# Altium PCB M2 PCB.PcbDoc
Units mm, origin at the board's own origin, x right, y up, seen from the top; angles counter-clockwise.
Board outline 128.4 x 50.8 mm, 2 copper layers (Top Layer, Bottom Layer); 14 components, 30 nets, 109 pads, 1 vias.
Unrouted connection lines stored in the file: 47.
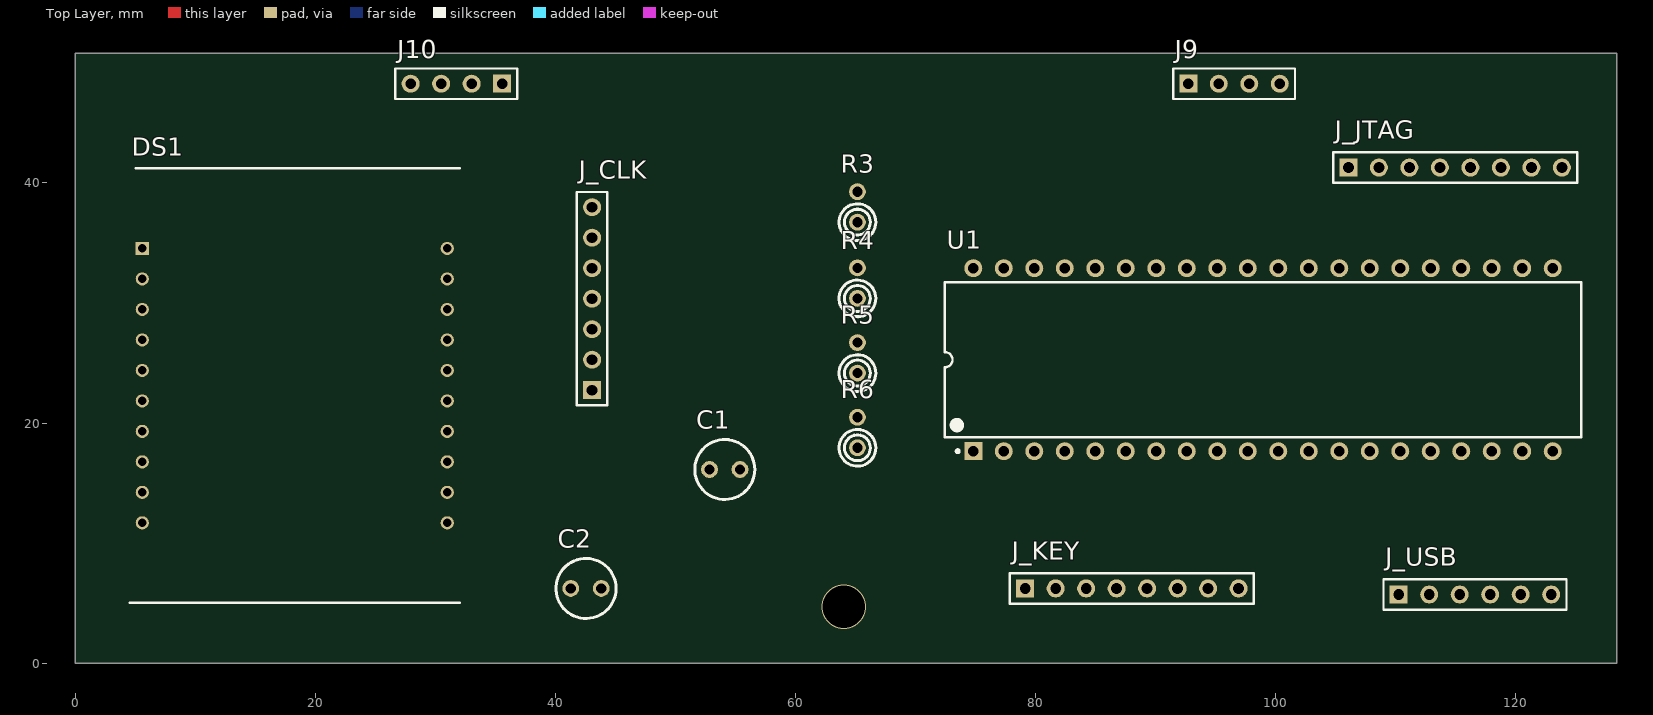
[diagram p0: Top Layer view]
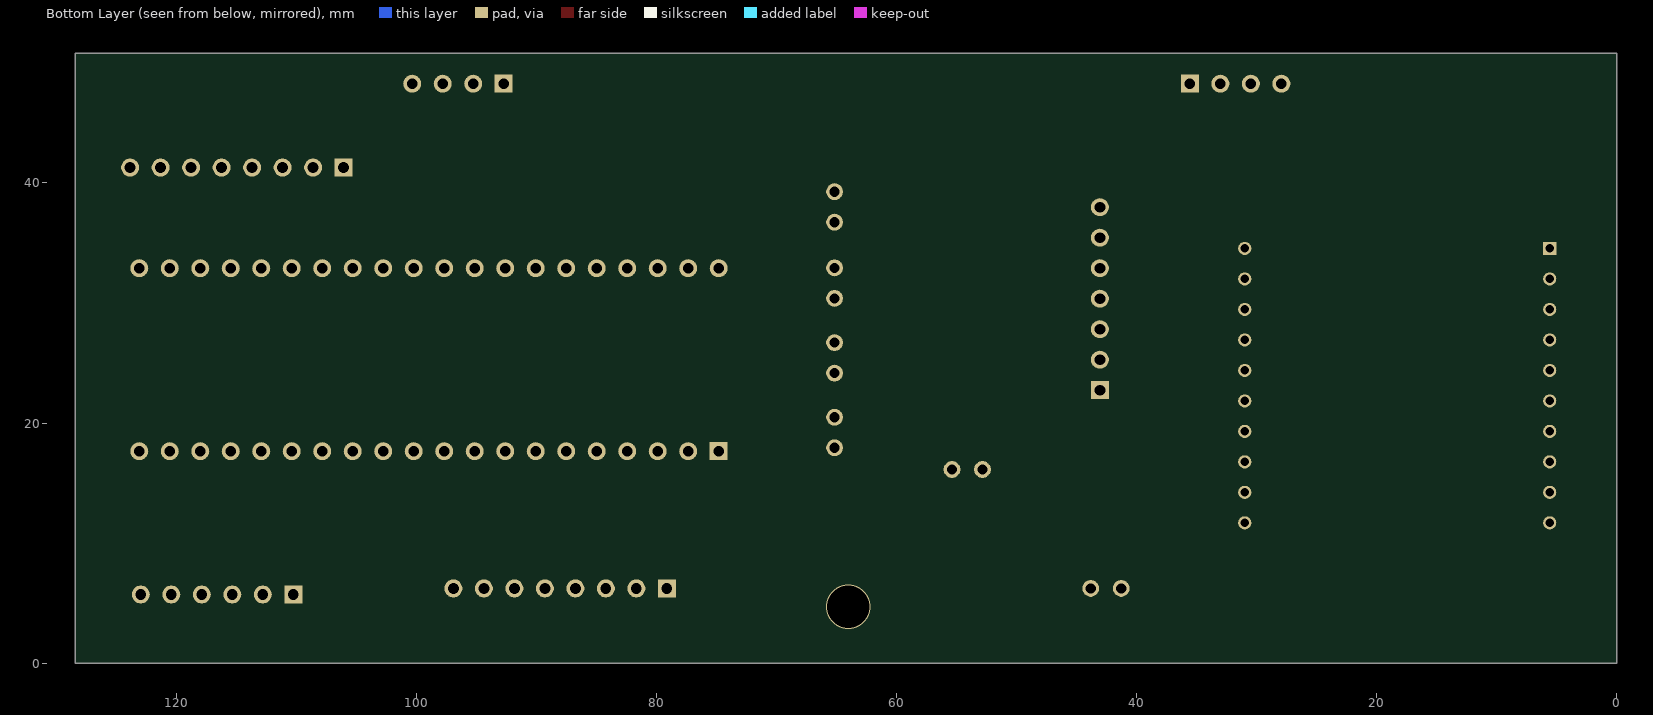
[diagram p1: Bottom Layer view, seen from below]

## Layer stack, top to bottom
Top Solder: solder mask 0.0102, Solder Resist, Dk 3.5
Top Layer: signal copper 0.0356
Dielectric 1: dielectric 0.32, FR-4, Dk 4.8
Bottom Layer: signal copper 0.0356
Bottom Solder: solder mask 0.0102, Solder Resist, Dk 3.5

## Board outline
0,0 128.397,0 128.397,50.8 0,50.8

## Design rules (kind name [scope] priority, off if disabled: settings)
Clearance [All] p1: gap=0.254 ignorepadtopadclearanceinfootprint=FALSE except(0: Arc-Hole Track-Hole SMDPad-Hole THPad-Hole Via-Hole Fill-Hole Poly-Hole Region-Hole Text-Hole)
PolygonConnect [All] p1: connectstyle=Relief reliefconductorwidth=0.254 reliefentries=4 polygonreliefangle="90 Angle" airgapwidth=0.254
RoomDefinition "M1 Schematic" [InComponentClass('M1 Schematic')] p1: confinementstyle=ConfineIn formatcopy=TRUE lockcomponents=FALSE outline 130.302,1.524 261.112,1.524 261.112,54.102 130.302,54.102
RoutingVias [All] p1: holewidth=0.711 width=1.27 viastyle="Through Hole" minholewidth=0.711 minwidth=1.27 maxholewidth=0.711 maxwidth=1.27
SolderMaskExpansion [All] p1: expansion=0.102 istentingtop=FALSE
Width [All] p1: maxlimit=0.254 minlimit=0.254 preferedwidth=0.254
30 further rules are at their usual default settings.

## Components (designator, comment, footprint, x,y, rotation, side; value= is the part's Value field where it differs from the comment)
C1 "Cap" RADIAL-0.1 54.102,16.129 r0 top value=1UF
C2 "Cap" RADIAL-0.1 42.545,6.223 r0 top value=1UF
DS1 "EA_DOGS104W-A" DIP2540W50P254L3600H260Q20N 18.288,23.114 r0 top
J9 "Signals" HDR1X4 92.71,48.26 r0 top locked
J10 "Power" HDR1X4 35.56,48.26 r180 top locked
J_CLK "Header 7" HDR1X7 43.053,22.733 r90 top
J_JTAG "Header 8" HDR1X8 106.045,41.275 r0 top
J_KEY "Header 8" HDR1X8 79.121,6.223 r0 top
J_USB "Header 6" HDR1X6 110.236,5.715 r0 top
R3 "Res1" AXIAL-0.1-RES 65.151,38 r90 top value=10K
R4 "Res1" AXIAL-0.1-RES 65.151,31.65 r90 top value=10K
R5 "Res1" AXIAL-0.1-RES 65.151,25.427 r90 top value=10K
R6 "Res1" AXIAL-0.1-RES 65.151,19.204 r90 top value=10K
U1 "ATmega32A-PU" 40P6 98.933,25.273 r90 top

## Footprints (in the part's own frame and the unit in brackets; to place one, negate y for a bottom-side part, rotate by r counter-clockwise, add the part's x,y. Pads: shape width x height; smd on the part's side, far side on the other; paste and mask are expansions set on the pad)
40P6 [mm] "40-Pin Ceramic Dual In-Line Package (CerDIP)"
  rect 1.5x1.5 hole 0.9: 1(-7.62,24.13)
  round 1.5 hole 0.9: 2(-7.62,21.59) 3(-7.62,19.05) 4(-7.62,16.51) 5(-7.62,13.97) 6(-7.62,11.43) 7(-7.62,8.89) 8(-7.62,6.35) 9(-7.62,3.81) 10(-7.62,1.27) 11(-7.62,-1.27) 12(-7.62,-3.81) 13(-7.62,-6.35) 14(-7.62,-8.89) 15(-7.62,-11.43) 16(-7.62,-13.97) 17(-7.62,-16.51) 18(-7.62,-19.05) 19(-7.62,-21.59) 20(-7.62,-24.13) 21(7.62,-24.13) 22(7.62,-21.59) 23(7.62,-19.05) 24(7.62,-16.51) 25(7.62,-13.97) 26(7.62,-11.43) 27(7.62,-8.89) 28(7.62,-6.35) 29(7.62,-3.81) 30(7.62,-1.27) 31(7.62,1.27) 32(7.62,3.81) 33(7.62,6.35) 34(7.62,8.89) 35(7.62,11.43) 36(7.62,13.97) 37(7.62,16.51) 38(7.62,19.05) 39(7.62,21.59) 40(7.62,24.13)
  silkscreen extent -7.74,-26.5 6.45,26.5, body extent -7.05,-26.47 7.05,26.47, height 5.72
AXIAL-0.1-RES [mm] "Axial Device, Thru-Hole; 2 Leads; 0.3 in Pin Spacing"
  round 1.4 hole 0.85: 1(-1.27,0) 2(1.27,0)
  silkscreen extent -2.8,-1.53 0.26,1.53
DIP2540W50P254L3600H260Q20N [mm]
  rect 1.1x1.1 hole 0.7: 1(-12.7,11.43)
  round 1.1 hole 0.7: 2(-12.7,8.89) 3(-12.7,6.35) 4(-12.7,3.81) 5(-12.7,1.27) 6(-12.7,-1.27) 7(-12.7,-3.81) 8(-12.7,-6.35) 9(-12.7,-8.89) 10(-12.7,-11.43) 11(12.7,-11.43) 12(12.7,-8.89) 13(12.7,-6.35) 14(12.7,-3.81) 15(12.7,-1.27) 16(12.7,1.27) 17(12.7,3.81) 18(12.7,6.35) 19(12.7,8.89) 20(12.7,11.43)
  silkscreen extent -13.75,-18.1 13.75,18.1, body extent -13.75,-18 13.75,18, height 2.6
HDR1X4 [mm] "Connector; Header; 4 Position"
  rect 1.5x1.5 hole 0.9: 1(0,0)
  round 1.5 hole 0.9: 2(2.54,0) 3(5.08,0) 4(7.62,0)
  silkscreen extent -1.27,-1.27 8.89,1.27
HDR1X6 [mm] "Connector; Header; 6 Position"
  rect 1.5x1.5 hole 0.9: 1(0,0)
  round 1.5 hole 0.9: 2(2.54,0) 3(5.08,0) 4(7.62,0) 5(10.16,0) 6(12.7,0)
  silkscreen extent -1.27,-1.27 13.97,1.27
HDR1X7 [mm] "Connector; Header; 7 Position"
  rect 1.5x1.5 hole 0.9: 1(0,0)
  round 1.5 hole 0.9: 2(2.54,0) 3(5.08,0) 4(7.62,0) 5(10.16,0) 6(12.7,0) 7(15.24,0)
  silkscreen extent -1.27,-1.27 16.51,1.27
HDR1X8 [mm] "Connector; Header; 8 Position"
  rect 1.5x1.5 hole 0.9: 1(0,0)
  round 1.5 hole 0.9: 2(2.54,0) 3(5.08,0) 4(7.62,0) 5(10.16,0) 6(12.7,0) 7(15.24,0) 8(17.78,0)
  silkscreen extent -1.27,-1.27 19.05,1.27
RADIAL-0.1 [mm] "Axial Device, Thru-Hole; 2 Leads; 0.3 in Pin Spacing"
  round 1.4 hole 0.85: 1(-1.27,0) 2(1.27,0)
  silkscreen extent -2.5,-2.5 2.5,2.5

## Part data
C1 C2: library part "CAP ALUM 1UF 20% 100V RADIAL", "Capacitor", Manufacturer Part Number=ESE105M100AC3EA, Voltage Rating=100V, LatestRevisionDate=17-Jul-2002, LatestRevisionNote="Re-released for DXP Platform.", Published=8-Jun-2000, Publisher="Altium Limited"
DS1: "Lcd Mod 40 Dig 10 X 4 Reflective", Background Color=White, Manufacturer="Display Visions", Manufacturer Part Number=EADOGS104W-A, Manufacturer_Name="ELECTRONIC ASSEMBLY", Manufacturer_Part_Number="EA DOGS104W-A", Max Operating Temperature=70°C, Min Operating Temperature=-20°C, Mouser2 Part Number=790-EADOGS104W-A, Supplier Part Number 1=1481-1233-ND, Backlight Type=LED, ComponentLink1Description=http://www.lcd-module.de/fileadmin/html-seiten/eng/pdf/doma/dogs104e.pdf?src-supplier=Digi-Key, ComponentLink1URL=http://www.lcd-module.de/fileadmin/html-seiten/eng/pdf/doma/dogs104e.pdf?src-supplier=Digi-Key, Datasheet Link="https://componentsearchengine.com//EA DOGS104W-A.pdf", Height=2.6mm, Interface=I2C,SPI, Mouser2 Price/Stock=https://www.mouser.com/Search/Refine.aspx?Keyword=790-EADOGS104W-A, Number of Characters=40, Pricing 1="1=18.94000, 10=14.28400, 100=11.99810, 500=11.55000 (USD)", RoHS=No, Stock 1=221, Supplier 1=Digi-Key
J9 J10: library part "Header 4", "Conn Header Vert 4POS 2.54MM", Color=Black, Manufacturer=Sullins, Manufacturer Part Number=PRPC004SAAN-RC, Package Quantity=1, Supplier Part Number 1=S1011EC-04-ND, Category=Connectors, ComponentLink1Description=https://datasheet.ciiva.com/741/xrxczzzsxxn-rc-st-11635-b-741241.pdf?src-supplier=Digi-Key, ComponentLink1URL=https://datasheet.ciiva.com/741/xrxczzzsxxn-rc-st-11635-b-741241.pdf?src-supplier=Digi-Key, Connector Type="Male Pin", Contact Mating Length=0.23inch, Contact Plating=Gold, Contact Type="Male Pin", LatestRevisionDate=17-Jul-2002, LatestRevisionNote="Re-released for DXP Platform.", Mount="Through Hole", Number of Positions=4, Number of Rows=1, Packaging=Bulk, Pitch=0.1inch, Pricing 1="1=0.15000, 10=0.14600, 25=0.10840, 50=0.09280, 100=0.08980, 250=0.07740, 500=0.07430 (USD)", Publisher="Altium Limited", RoHS=Yes, RoHS Compliant=Yes, Series=-, Stock 1=11461, Supplier 1=Digi-Key, Termination=Solder
J_CLK: "Female, 7C, Straight, .100\"CC; 3.20mm Tail, No Mt. 100u\" Tin; PBT, Phos Bronze, 105 C", Color=Black, Manufacturer=Sullins, Manufacturer Part Number=PPTC071LFBN-RC, Package Quantity=1000, Supplier Part Number 1=S7005-ND, Category=Connectors, ComponentLink1Description=https://media.digikey.com/pdf/Data%20Sheets/Sullins%20PDFs/Female_Headers.100_DS.pdf?src-supplier=Digi-Key, ComponentLink1URL=https://media.digikey.com/pdf/Data%20Sheets/Sullins%20PDFs/Female_Headers.100_DS.pdf?src-supplier=Digi-Key, ComponentLink2Description=http://www.sullinscorp.com/catalogs/78_Page80-81_HEADER_.100_2.54mm_FEMALE.pdf?src-supplier=Future+Electronics, ComponentLink2URL=http://www.sullinscorp.com/catalogs/78_Page80-81_HEADER_.100_2.54mm_FEMALE.pdf?src-supplier=Future+Electronics, Connector Type=Header, Contact Material=Bronze, Contact Plating=Tin, Contact Type="Female Socket", Height=8.5mm, Housing Material=Plastic, LatestRevisionDate=17-Jul-2002, LatestRevisionNote="Re-released for DXP Platform.", Lead Free="Lead Free", Length=18.3mm, Mount="Through Hole", Number of Positions=7, Number of Rows=1, Packaging=Bulk, Pitch=0.1inch, Pricing 1="1=0.59000, 10=0.51500, 80=0.42438, 440=0.36900, 1000=0.30442, 5000=0.26752, 10000=0.26650 (USD)", Publisher="Altium Limited", RoHS=Yes, Stock 1=25873, Supplier 1=Digi-Key, Termination=Solder, Width=2.5mm
J_JTAG J_KEY: "Conn Header Vert 8POS 2.54MM", Color=Black, Manufacturer=Sullins, Manufacturer Part Number=PRPC008SAAN-RC, Package Quantity=1, Supplier Part Number 1=S1011EC-08-ND, Category=Connectors, ComponentLink1Description=https://datasheet.ciiva.com/741/xrxczzzsxxn-rc-st-11635-b-741237.pdf?src-supplier=Digi-Key, ComponentLink1URL=https://datasheet.ciiva.com/741/xrxczzzsxxn-rc-st-11635-b-741237.pdf?src-supplier=Digi-Key, Connector Type="Male Pin", Contact Mating Length=0.23inch, Contact Plating=Gold, Contact Type="Male Pin", LatestRevisionDate=17-Jul-2002, LatestRevisionNote="Re-released for DXP Platform.", Lead Free="Lead Free", Mount="Through Hole", Number of Positions=8, Number of Rows=1, Packaging=Bulk, Pitch=0.1inch, Pricing 1="1=0.25000, 10=0.23200, 25=0.19800, 50=0.17340, 100=0.16100, 250=0.14240, 500=0.13622 (USD)", Publisher="Altium Limited", RoHS=Yes, RoHS Compliant=Yes, Series=-, Stock 1=4930, Supplier 1=Digi-Key, Termination=Solder
J_USB: "Conn Header .100\" Sngl Str 6POS", Color=Black, Manufacturer=Sullins, Manufacturer Part Number=PRPC006SAAN-RC, Package Quantity=1, Supplier Part Number 1=S1011EC-06-ND, Category=Connectors, ComponentLink1Description=https://datasheet.ciiva.com/741/xrxczzzsxxn-rc-st-11635-b-741239.pdf?src-supplier=Digi-Key, ComponentLink1URL=https://datasheet.ciiva.com/741/xrxczzzsxxn-rc-st-11635-b-741239.pdf?src-supplier=Digi-Key, Connector Type="Male Pin", Contact Mating Length=0.23inch, Contact Plating=Gold, Contact Type="Male Pin", LatestRevisionDate=17-Jul-2002, LatestRevisionNote="Re-released for DXP Platform.", Lead Free="Lead Free", Mount="Through Hole", Number of Positions=6, Number of Rows=1, Packaging=Bulk, Pitch=0.1inch, Pricing 1="1=0.19000, 10=0.17400, 25=0.14880, 50=0.13000, 100=0.12070, 250=0.10680, 500=0.10216 (USD)", Publisher="Altium Limited", RoHS=Yes, RoHS Compliant=Yes, Series=-, Stock 1=13258, Supplier 1=Digi-Key, Termination=Solder
R3 R4 R5 R6: library part "RES 10K OHM 5% 1/4W AXIAL", "Resistor", Manufacturer Part Number=CFR-25JB-52-10K, Power Rating=1/4W, Tolerance=0.05, LatestRevisionDate=17-Jul-2002, LatestRevisionNote="Re-released for DXP Platform.", Published=8-Jun-2000, Publisher="Altium Limited"
U1: library part CMP-0095-00028-2, "8-bit AVR Microcontroller, 2.7-5.5V, 16MHz, 32KB Flash, 1KB EEPROM, 2KB SRAM, 40-pin PDIP, Industrial Grade (-40°C to 85°C)", Case/Package=DIP, Frequency=20MHz, Manufacturer=Microchip, Manufacturer Part Number=ATMEGA324A-PU, Max Operating Temperature=85°C, Min Operating Temperature=-40°C, Supplier Part Number 1=ATMEGA324A-PU-ND, Category=Microcontrollers, Code_JEDEC=MS-011-AC, ComponentLink1Description="Manufacturer URL", ComponentLink1URL=http://www.atmel.com/, ComponentLink2Description="ATmega32A Datasheet", ComponentLink2URL=http://www.atmel.com/dyn/resources/prod_documents/doc8155.pdf, ComponentLink3Description="ATmega32A Summary", ComponentLink3URL=http://www.atmel.com/dyn/resources/prod_documents/8155S.pdf, ComponentLink4Description=http://ww1.microchip.com/downloads/en/devicedoc/Atmel-8272-8-bit-AVR-microcontroller-ATmega164A_PA-324A_PA-644A_PA-1284_P_summary.pdf?src-supplier=Digi-Key, ComponentLink4URL=http://ww1.microchip.com/downloads/en/devicedoc/Atmel-8272-8-bit-AVR-microcontroller-ATmega164A_PA-324A_PA-644A_PA-1284_P_summary.pdf?src-supplier=Digi-Key, Core Architecture=AVR, DatasheetVersion="revC, Feb-2011", Interface=I2C,SPI,UART,USART, Memory Size=32KB, Memory Type=FLASH, Number of I/Os=32, Oscillator Type=Internal, PackageDescription="40-lead (0.600\"/15.24mm Wide) Plastic Dual Inline Package (PDIP)", PackageReference=40P6, PackageVersion="revB, Sep-2001", Packaging=Rail/Tube, Peripherals="Brown-out Detect/Reset,POR,PWM,WDT", Pricing 1="1=4.77000, 25=4.38160, 100=3.97500 (USD)", RevisionNote="DatasheetVersion updated. URLs added.", RoHS=Yes, RoHS Compliant=Yes, Stock 1=315, Supplier 1=Digi-Key

## Via types
v1: diameter 3.71, hole 3.51, Top Layer to Bottom Layer, 1 vias

## Nets (pads, with @x,y where several pads share a name; then routed paths per layer and width w, separated by ;. In a path a pad name is that pad's centre, name@x,y a point inside that pad or via, vN(x,y) a via of type N, cw(c..) or ccw(c..) an arc to the next point about the centre after c; other vN are vias at no path point)
"+3.3 V": J10.3 J_CLK.1 J_JTAG.2 J_USB.4
"+5 V": C1.1 DS1.13 J10.2 U1.10
/TXEN: J9.1 U1.20
GND: C1.2 C2.2 DS1.12 DS1.14 DS1.18 DS1.19 J9.4 J10.4 J_CLK.2 J_JTAG.3 J_USB.6 U1.31
LO_F1_0: J9.2 J_CLK.7
LO_F1_90: J9.3 J_CLK.6
LO_F2: J10.1 J_CLK.5
NetC2_1: C2.1 DS1.11
NetDS1_15: DS1.15 DS1.16 J_CLK.3 U1.23
NetDS1_17: DS1.17 J_CLK.4 U1.22
NetDS1_20: DS1.20 U1.21
NetJ_JTAG_4: J_JTAG.4 U1.26
NetJ_JTAG_5: J_JTAG.5 U1.24
NetJ_JTAG_6: J_JTAG.6 U1.9
NetJ_JTAG_7: J_JTAG.7 U1.27
NetJ_JTAG_8: J_JTAG.8 U1.25
NetJ_KEY_1: J_KEY.1 R3.1
NetJ_KEY_2: J_KEY.2 R4.1
NetJ_KEY_3: J_KEY.3 R5.1
NetJ_KEY_4: J_KEY.4 R6.1
NetJ_KEY_5: J_KEY.5 U1.1
NetJ_KEY_6: J_KEY.6 U1.2
NetJ_KEY_7: J_KEY.7 U1.3
NetJ_KEY_8: J_KEY.8 U1.4
NetJ_USB_2: J_USB.2 U1.15
NetJ_USB_3: J_USB.3 U1.14
NetR3_2: R3.2 U1.40
NetR4_2: R4.2 U1.39
NetR5_2: R5.2 U1.38
NetR6_2: R6.2 U1.37
pads on no net: DS1.1 DS1.2 DS1.3 DS1.4 DS1.5 DS1.6 DS1.7 DS1.8 DS1.9 DS1.10 J_JTAG.1 J_USB.1 J_USB.5 U1.5 U1.6 U1.7 U1.8 U1.11 U1.12 U1.13 U1.16 U1.17 U1.18 U1.19 U1.28 U1.29 U1.30 U1.32 U1.33 U1.34 U1.35 U1.36
copper on no net:
  other v1: 64.008,4.699